# EAGLE board 04B-355 (EAGLE 6.3)

Size 160 x 100 mm. Coordinates in mm from the lower left corner, seen from the top.
Outline: 0,0 160,0 160,100 0,100 0,0
Copper layers (1*16): Top 0.035mm / dielectric 1.5mm / Bottom 0.035mm
Design rules "default": minimum track width 10mil, minimum drill 0.6mm, track to track 8mil, track to pad 8mil, pad to pad 8mil, via to via 8mil, smd to smd 8mil, copper to edge 40mil, drill to drill 8mil, minimum pad ring 10mil, minimum via ring 8mil, stop-mask expansion 4mil, vias tented up to drill 0mil, thermal gap 10mil

## Footprints (pad centres in the part's own frame; a part is rotated, then mirrored left to right if it is on the bottom)
C050-024X044 = drill 1.1 pad 2 square: 1 -2.5,0 | drill 1.1 pad 2: 2 2.5,0
C5MM = drill 1 square: + -2.5,0 | drill 1: - 2.5,0
PINS_1X7 = drill 1 square: 1 0,0 | drill 1: 2 2.5,0; 3 5,0; 4 7.5,0; 5 10,0; 6 12.5,0; 7 15,0
MINIPCB_0P_50X75 = hole 2.4: 72.5,47.5; 2.5,47.5
TO92-EBC-OVAL = drill 0.813 long: B 0,-1.27; C 2.54,-1.27; E -2.54,-1.27
0204/10 = drill 0.9 pad 1.75: 1 -5,0; 2 5,0
TRIM_0100 = drill 1.1 pad 1.93 square: 1 0,0 | drill 1.1 pad 1.93: 2 2.5,0; 3 5,0
PINS_1_TESTPOINT_KE5000_NOTEXT = drill 1: 1 0,0

## Placement (x,y rotation side)
C1  [C050-024X044]  -63.5,66.04 0 top  (outside the outline)
C2  [C050-024X044]  -73.66,66.04 0 top  (outside the outline)
C3  [C5MM]  -33.02,57.15 0 top  (outside the outline)
C4  [C5MM]  -46.99,57.15 0 top  (outside the outline)
C5  [C050-024X044]  -83.82,66.04 0 top  (outside the outline)
C6  [C5MM]  -60.96,57.15 0 top  (outside the outline)
C7  [C050-024X044]  -17.78,73.66 0 top  (outside the outline)
C8  [C5MM]  -74.93,57.15 0 top  (outside the outline)
C9  [C050-024X044]  -27.94,73.66 0 top  (outside the outline)
C10  [C5MM]  -19.05,57.15 0 top  (outside the outline)
C11  [C050-024X044]  -38.1,73.66 0 top  (outside the outline)
C12  [C050-024X044]  -48.26,73.66 0 top  (outside the outline)
P1  [PINS_1X7]  -29.21,97.79 0 top  (outside the outline)
PCB1  [MINIPCB_0P_50X75]  -88.9,1.27 0 top  (outside the outline)
Q1  [TO92-EBC-OVAL]  -86.36,54.61 0 top  (outside the outline)
Q2  [TO92-EBC-OVAL]  -93.98,54.61 0 top  (outside the outline)
Q3  [TO92-EBC-OVAL]  -16.51,67.31 0 top  (outside the outline)
R1  [0204/10]  -59.69,73.66 0 top  (outside the outline)
R2  [TRIM_0100]  -27.94,66.04 0 top  (outside the outline)
R3  [0204/10]  -72.39,73.66 0 top  (outside the outline)
R4  [0204/10]  -85.09,73.66 0 top  (outside the outline)
R5  [0204/10]  -19.05,80.01 0 top  (outside the outline)
R6  [TRIM_0100]  -40.64,66.04 0 top  (outside the outline)
R7  [0204/10]  -31.75,80.01 0 top  (outside the outline)
R8  [0204/10]  -44.45,80.01 0 top  (outside the outline)
R9  [0204/10]  -57.15,80.01 0 top  (outside the outline)
R10  [0204/10]  -69.85,80.01 0 top  (outside the outline)
R11  [0204/10]  -82.55,80.01 0 top  (outside the outline)
R12  [0204/10]  -19.05,86.36 0 top  (outside the outline)
R13  [0204/10]  -31.75,86.36 0 top  (outside the outline)
R14  [0204/10]  -44.45,86.36 0 top  (outside the outline)
R15  [0204/10]  -57.15,86.36 0 top  (outside the outline)
R16  [TRIM_0100]  -53.34,66.04 0 top  (outside the outline)
R17  [0204/10]  -69.85,86.36 0 top  (outside the outline)
R18  [0204/10]  -82.55,86.36 0 top  (outside the outline)
R19  [0204/10]  -19.05,92.71 0 top  (outside the outline)
TP1  [PINS_1_TESTPOINT_KE5000_NOTEXT]  -29.21,91.44 0 top  (outside the outline)
TP2  [PINS_1_TESTPOINT_KE5000_NOTEXT]  -35.56,91.44 0 top  (outside the outline)
TP3  [PINS_1_TESTPOINT_KE5000_NOTEXT]  -41.91,91.44 0 top  (outside the outline)
TP4  [PINS_1_TESTPOINT_KE5000_NOTEXT]  -48.26,91.44 0 top  (outside the outline)
TP5  [PINS_1_TESTPOINT_KE5000_NOTEXT]  -54.61,91.44 0 top  (outside the outline)
TP6  [PINS_1_TESTPOINT_KE5000_NOTEXT]  -60.96,91.44 0 top  (outside the outline)
TP7  [PINS_1_TESTPOINT_KE5000_NOTEXT]  -67.31,91.44 0 top  (outside the outline)
TP8  [PINS_1_TESTPOINT_KE5000_NOTEXT]  -73.66,91.44 0 top  (outside the outline)
TP9  [PINS_1_TESTPOINT_KE5000_NOTEXT]  -80.01,91.44 0 top  (outside the outline)

## Library data of the parts
C1-C12 P1 Q1-Q3 R1-R19 TP1-TP9 = minipcb
PCB1 = minipcb; CIRCUIT_CATEGORY: CIRCUIT CATEGORY; REVISION: A1; TITLE: TITLE

## Nets
GND: C1.2 C2.2 C3.- C4.- C5.2 C6.- C7.2 C8.- C9.2 C10.- P1.1 R3.1 R5.1 R11.1 R15.1
N$1: Q2.E R11.2
N$2: Q1.E R9.2
N$3: P1.7 Q1.C R8.1 TP7.1
N$4: P1.6 Q3.C R12.1 TP6.1
N$5: Q3.E R13.2
N$6: Q2.C R9.1 R13.1 TP5.1
N$7: R1.1 R2.3
N$8: C12.2 R7.2
N$9: C11.2 R14.1
N$10: Q3.B R14.2
N$11: Q1.B R7.1
N$12: C5.1 C6.+ Q2.B TP4.1
N$13: R2.1 R3.2
N$14: C1.1 C3.+ R2.2 R17.1 TP3.1
N$15: R4.1 R6.3
N$16: R5.2 R6.1
N$17: C7.1 C8.+ R6.2 R18.1 TP8.1
N$18: R10.1 R16.3
N$19: R15.2 R16.1
N$20: C9.1 C10.+ R16.2 R19.1 TP9.1
N$21: C11.1 P1.5 TP2.1
N$22: C12.1 P1.4 TP1.1
V+: C2.1 C4.+ P1.2 R1.2 R4.2 R8.2 R10.2 R12.2

## Tracks (layer width: path | path; a pad name or v marks a point on that pad's centre or on a via)
GND  (14 unrouted)
N$1  (1 unrouted)
N$2  (1 unrouted)
N$3  (3 unrouted)
N$4  (3 unrouted)
N$5  (1 unrouted)
N$6  (3 unrouted)
N$7  (1 unrouted)
N$8  (1 unrouted)
N$9  (1 unrouted)
N$10  (1 unrouted)
N$11  (1 unrouted)
N$12  (3 unrouted)
N$13  (1 unrouted)
N$14  (4 unrouted)
N$15  (1 unrouted)
N$16  (1 unrouted)
N$17  (4 unrouted)
N$18  (1 unrouted)
N$19  (1 unrouted)
N$20  (4 unrouted)
N$21  (2 unrouted)
N$22  (2 unrouted)
V+  (7 unrouted)